# EAGLE board EbookReader Board (EAGLE 9.7.0)
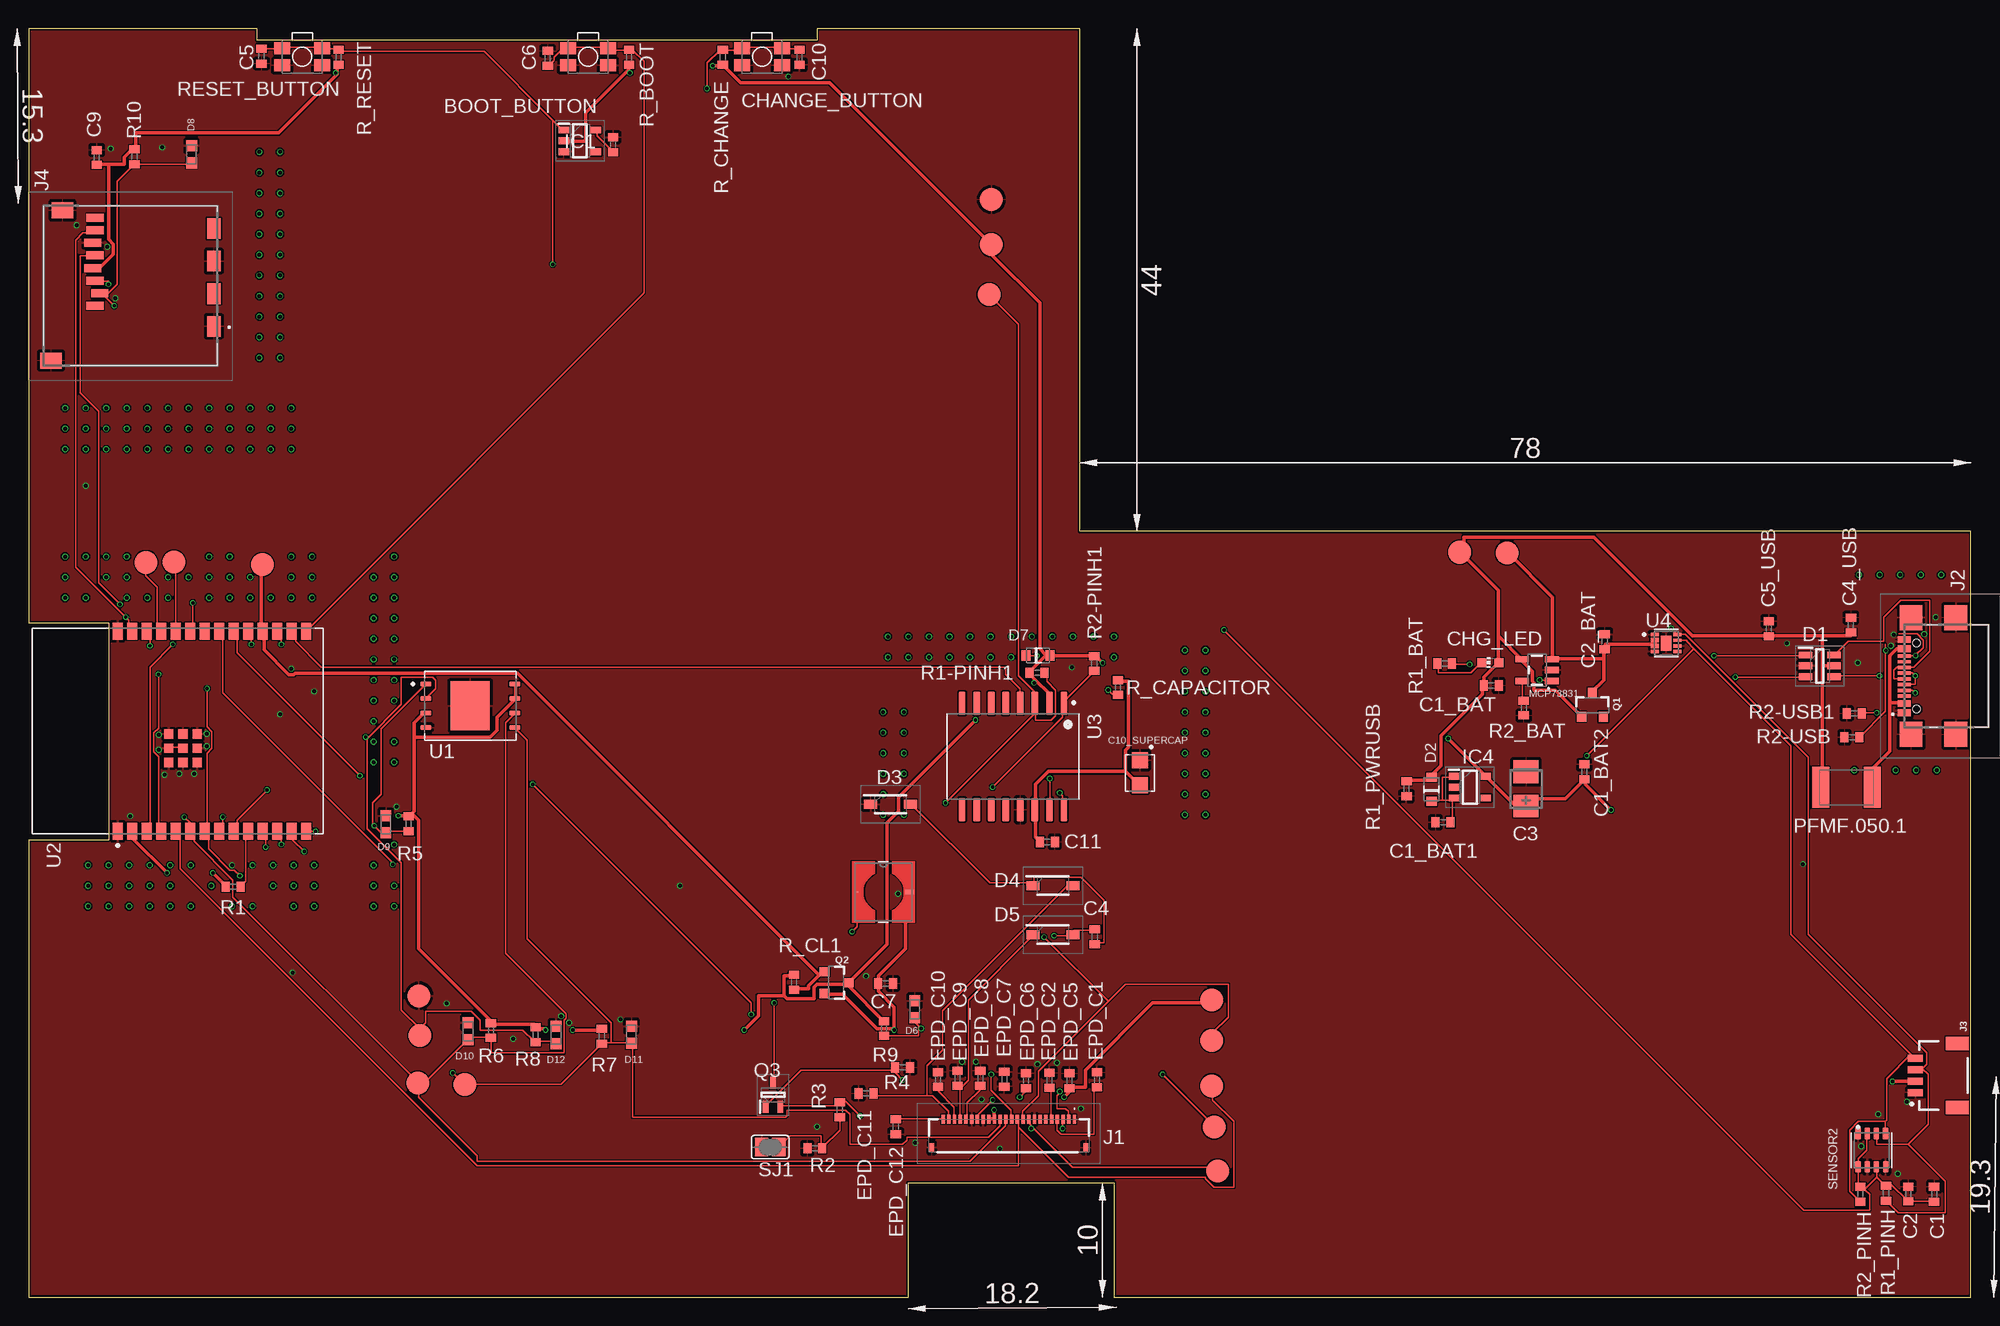
[diagram p0: board, top side]
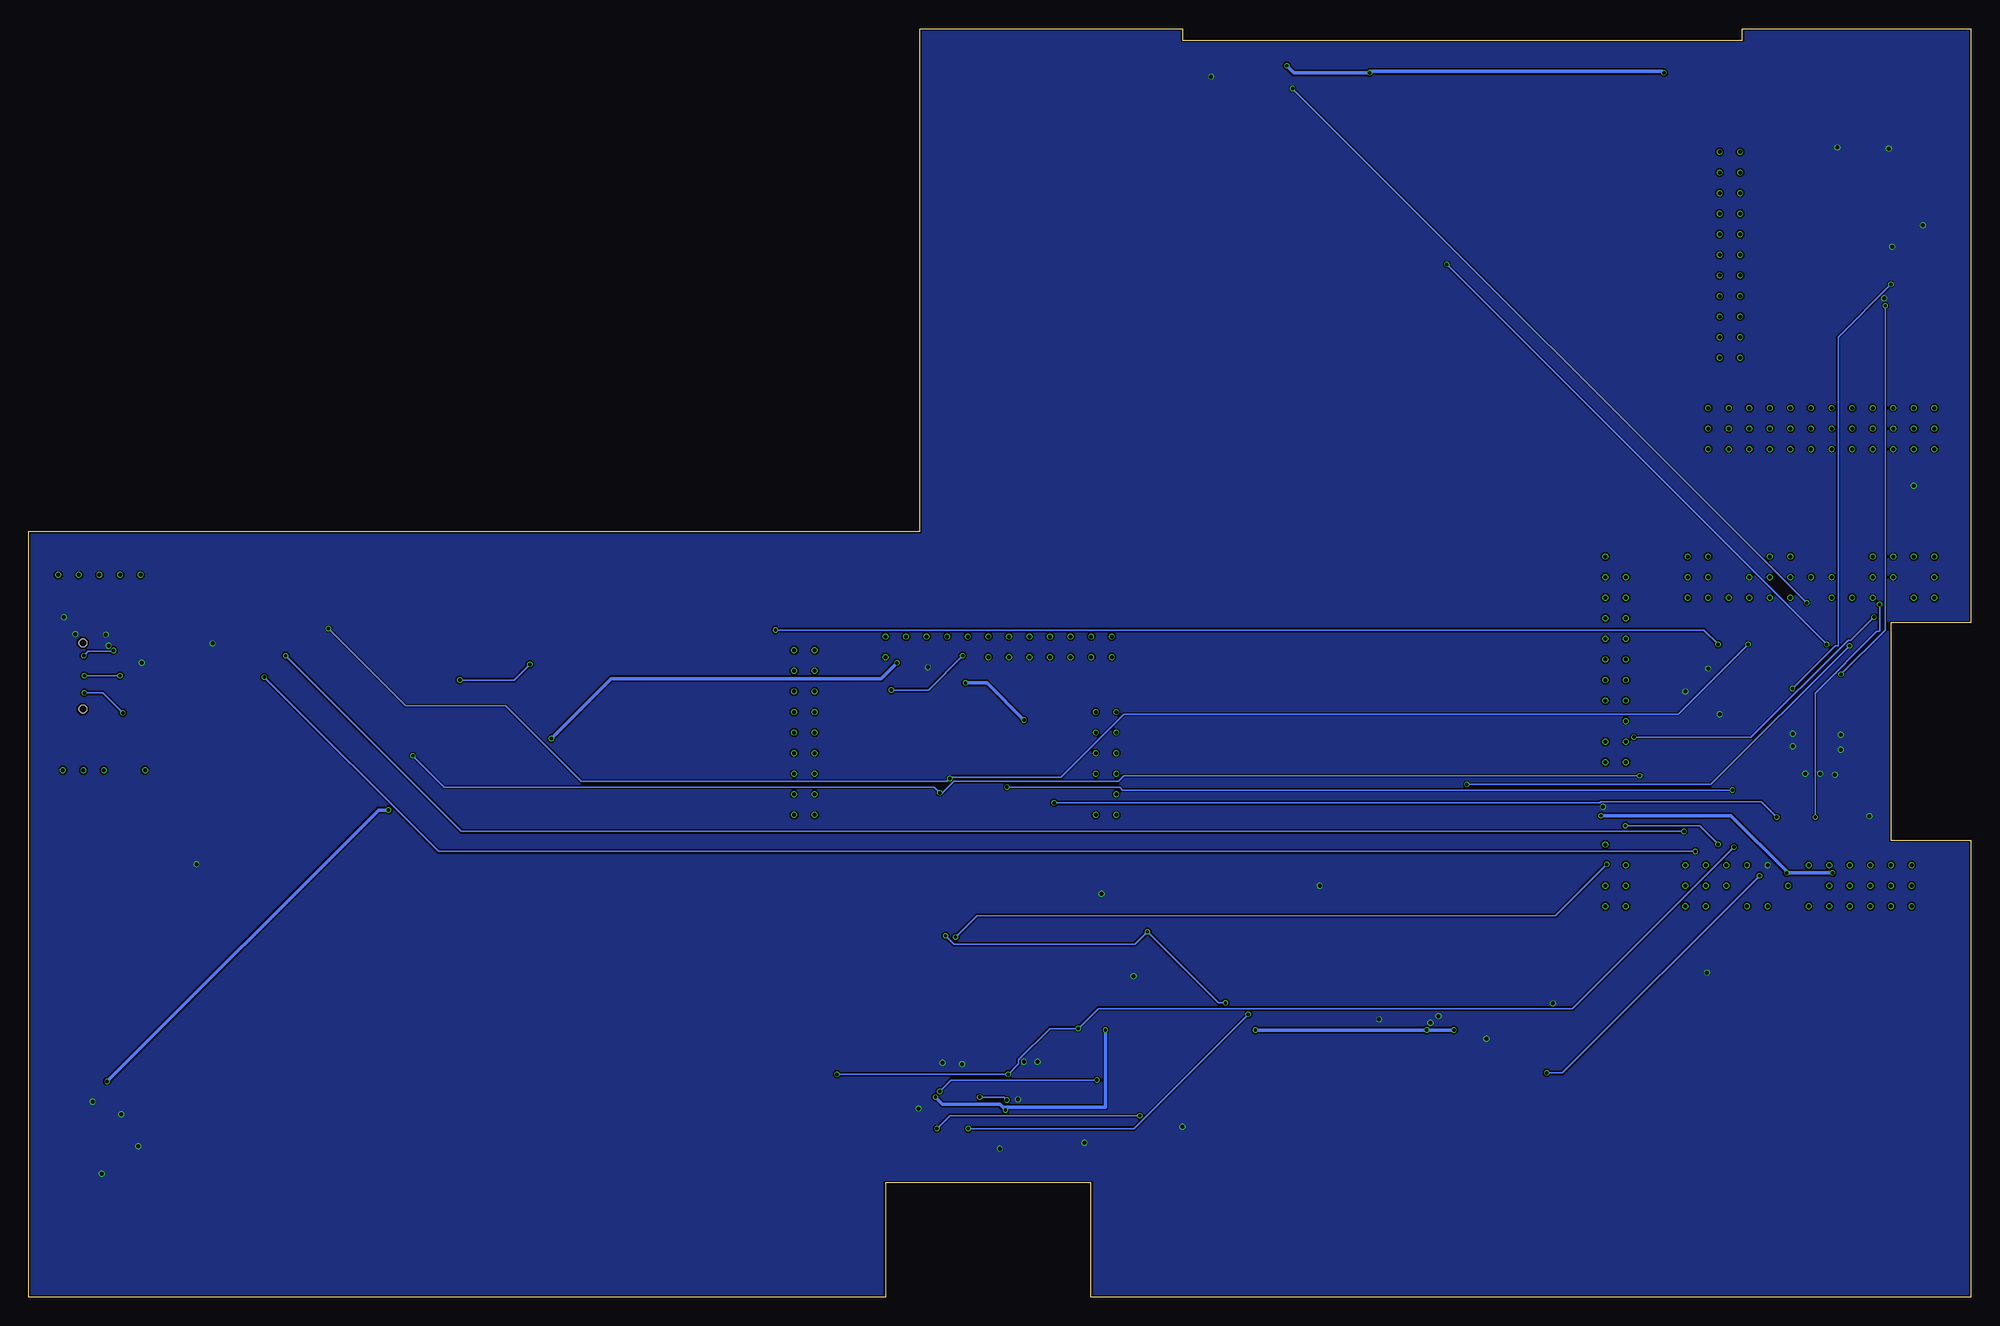
[diagram p1: board, bottom side, seen from below]

Size 170 x 111 mm. Coordinates in mm from the lower left corner, seen from the top.
Outline: 0,40 0,0 77,0 77,10 95,10 95,0 170,0 170,67 92,67 92,111 69,111 69,110 20,110 20,111 0,111 0,59 7,59 7,40 0,40
Copper layers (1*16): Top / Bottom
Stack-up Default Layer Stack: Top User Defined 0.035mm / Dielectric-1 User Defined 1mm / Bottom User Defined 0.035mm
Design rules: minimum copper width classes=1 0.3mm, minimum copper width 5mil, minimum drill size 0.3mm, copper clearance wire_polygon to wire_polygon 5mil, copper clearance wire_polygon to pad_smd 5mil, copper clearance wire_polygon to via 5mil, copper clearance pad_smd to pad_smd 5mil, copper clearance pad_smd to via 5mil, copper clearance via to via 5mil, copper clearance smd to pad (same net) 5mil, copper clearance smd to via (same net) 5mil, copper clearance smd to smd (same net) 5mil, dimension clearance 0.2mm, via restrict clearance 0mil, restrict clearance 0mil, drill distance 6mil, keepout clearance 0mil
Net classes: 1 Trasee de alimentare: width 0.3 mm

## Footprints (pad centres in the part's own frame; a part is rotated, then mirrored left to right if it is on the bottom)
TP20R = smd 2 x 2: TP 0,0
MYBUTTON = smd 1.4 x 1.05: 1 1.75,0.75; 2 -1.75,0.75; 3 -1.75,-0.75; 4 1.75,-0.75
ESP32_WROVER_EAGLE-LTSPICE_C0402 = smd 0.7 x 0.9: 1 -0.65,0; 2 0.65,0
RCL_CT3528 = smd 2 x 2.2: + -1.5,0; - 1.5,0
CAPCP3225X100N = smd 1.4 x 1.4: 1 -1.1,0; 2 1.1,0
ADAFRUIT_CHIP-LED0603 = smd 0.8 x 0.8: A 0,-0.75; C 0,0.75
SOT95P280X145-6N = smd 1.2 x 0.6: 1 -1.25,0.95; 2 -1.25,0; 3 -1.25,-0.95; 4 1.25,-0.95; 5 1.25,0; 6 1.25,0.95
ESP32_WROVER_AVX---SD0805S020S1R0_AVX_SD0805S020S1R0_0 = smd 0.8 x 0.9: 1 -1.05,0; 2 1.05,0
SOD3716X135N = smd 1.15 x 0.8: 1 -1.75,0; 2 1.75,0
DIOC1608X36N = smd 0.97 x 0.94: 1 -0.75,0; 2 0.75,0
SOT95P280X125-5N = smd 0.9 x 0.6: 1 -1.4,0.95; 2 -1.4,0; 3 -1.4,-0.95; 4 1.4,-0.95; 5 1.4,0.95
SOT95P280X120-5N = smd 0.9 x 0.6: 1 -1.4,0.95; 2 -1.4,0; 3 -1.4,-0.95; 4 1.4,-0.95; 5 1.4,0.95
FH34SRJ24S05SH99 = smd 0.3 x 0.8: 1 5.75,1.45; 2 5.25,1.45; 3 4.75,1.45; 4 4.25,1.45; 5 3.75,1.45; 6 3.25,1.45; 7 2.75,1.45; 8 2.25,1.45; 9 1.75,1.45; 10 1.25,1.45; 11 0.75,1.45; 12 0.25,1.45; 13 -0.25,1.45; 14 -0.75,1.45; 15 -1.25,1.45; 16 -1.75,1.45; 17 -2.25,1.45; 18 -2.75,1.45; 19 -3.25,1.45; 20 -3.75,1.45; 21 -4.25,1.45; 22 -4.75,1.45; 23 -5.25,1.45; 24 -5.75,1.45 | smd 0.4 x 0.8: MP1 6.75,-1.05; MP2 -6.75,-1.05
SAMACSYS_PARTS_USB4110GFA = smd 0.3 x 1.15: A1 -3.35,3.678; A4 -2.55,3.678; A5 -1.25,3.678; A6 -0.25,3.678; A7 0.25,3.678; A8 1.25,3.678; A9 2.55,3.678; A12 3.35,3.678; B1 3.05,3.678; B4 2.25,3.678; B5 1.75,3.678; B6 0.75,3.678; B7 -0.75,3.678; B8 -1.75,3.678; B9 -2.25,3.678; B12 -3.05,3.678 | smd 2.18 x 2: MP1 -5.11,-0.827; MP2 5.11,-0.827; MP3 -5.11,3.103; MP4 5.11,3.103 | hole 0.65: -2.89,2.603; 2.89,2.603
JST04_1MM_RA = smd 0.6 x 1.35: 1 -1.5,0; 2 -0.5,0; 3 0.5,0; 4 1.5,0 | smd 1.2 x 2: NC1 2.8,-3.675; NC2 -2.8,-3.675
112ATAARR03ATTEND = smd 1.8 x 1.2: G1 10.6,10.4; G2 4.9,10.4; S1 7.75,10.4; S2 2.05,10.4 | smd 1.4 x 1.9: G3 13.6,-3.85; G4 0.45,-2.85 | smd 0.7 x 1.5: P1 8.8,0; P2 7.7,0.4; P3 6.6,0; P4 5.5,-0.2; P5 4.4,0; P6 3.3,-0.2; P7 2.2,0; P8 1.1,0
IND_4828-WE-TPC_WRE = smd 0.127 x 0.127: 1 -2.286,0 | smd 0.813 x 0.406: 2 2.286,0
ESP32_WROVER_SPARKFUN-IC-POWER_SOT23-5 = smd 0.55 x 1.2: 1 -0.95,-1.3; 2 0,-1.3; 3 0.95,-1.3; 4 0.95,1.3; 5 -0.95,1.3
ESP32C6_VARISTOR_CT/CN1812 = smd 1.5 x 3.6: 1 -2.25,0; 2 2.25,0
ESP32_WROVER_SPARKFUN-DISCRETESEMI_SOT23-3 = smd 0.8 x 0.9: 1 -0.95,-1; 2 0.95,-1; 3 0,1.1
SOT65P210X110-3N = smd 1.05 x 0.5: 1 -1.05,0.65; 2 -1.05,-0.65; 3 1.05,0
ESP32_WROVER_EAGLE-LTSPICE_R0402 = smd 0.7 x 0.9: 1 -0.65,0; 2 0.65,0
ESP32_WROVER_BME680_PSON80P300X300X100-8N = smd 1.016 x 0.5: 1 1.458,1.2; 2 1.458,0.4; 3 1.458,-0.4; 4 1.458,-1.2; 5 -1.458,-1.22; 6 -1.458,-0.4; 7 -1.458,0.4; 8 -1.458,1.2
SJ = smd 1.168 x 1.6: 1 -0.762,0; 2 0.762,0
SON127P600X800X80-9N = smd 0.94 x 0.44: 1 -3.895,1.905; 2 -3.895,0.635; 3 -3.895,-0.635; 4 -3.895,-1.905; 5 3.895,-1.905; 6 3.895,-0.635; 7 3.895,0.635; 8 3.895,1.905 | smd 3.4 x 4.3: 9 0,0
XCVR_ESP32-C6-WROOM-1-N8 = smd 1.5 x 0.9: 1 -8.75,5.26; 2 -8.75,3.99; 3 -8.75,2.72; 4 -8.75,1.45; 5 -8.75,0.18; 6 -8.75,-1.09; 7 -8.75,-2.36; 8 -8.75,-3.63; 9 -8.75,-4.9; 10 -8.75,-6.17; 11 -8.75,-7.44; 12 -8.75,-8.71; 13 -8.75,-9.98; 14 -8.75,-11.25; 15 8.75,-11.25; 16 8.75,-9.98; 17 8.75,-8.71; 18 8.75,-7.44; 19 8.75,-6.17; 20 8.75,-4.9; 21 8.75,-3.63; 22 8.75,-2.36; 23 8.75,-1.09; 24 8.75,0.18; 25 8.75,1.45; 26 8.75,2.72; 27 8.75,3.99; 28 8.75,5.26 | smd 0.8 x 0.8: 29_1 -2.755,0.79; 29_2 -1.505,0.79; 29_3 -0.255,0.79; 29_4 -2.755,-0.46; 29_5 -1.505,-0.46; 29_6 -0.255,-0.46; 29_7 -2.755,-1.71; 29_8 -1.505,-1.71; 29_9 -0.255,-1.71
SOIC127P1032X265-16N = smd 2.05 x 0.59: 1 -4.655,4.445; 2 -4.655,3.175; 3 -4.655,1.905; 4 -4.655,0.635; 5 -4.655,-0.635; 6 -4.655,-1.905; 7 -4.655,-3.175; 8 -4.655,-4.445; 9 4.655,-4.445; 10 4.655,-3.175; 11 4.655,-1.905; 12 4.655,-0.635; 13 4.655,0.635; 14 4.655,1.905; 15 4.655,3.175; 16 4.655,4.445
SON50P200X200X80-9N = smd 0.76 x 0.27: 1 -0.985,0.75; 4 -0.985,-0.75; 5 0.985,-0.75; 6 0.985,-0.25; 7 0.985,0.25; 8 0.985,0.75 | smd 0.813 x 0.406: 2 -0.985,0.25; 3 -0.985,-0.25 | smd 0.9 x 1.3: 9 0,0

## Placement (x,y rotation side)
3V3  TPTP20R  [TP20R]  84.27,92.09 0 top
BOOT_BUTTON  BUTTON_CUSYOMV1  [MYBUTTON]  48.97,108.53 180 top
C1  100nF  [ESP32_WROVER_EAGLE-LTSPICE_C0402]  166.78,9.01 90 top
C1_BAT  4.7uF  [ESP32_WROVER_EAGLE-LTSPICE_C0402]  128.02,53.52 0 top
C1_BAT1  4.7uF  [ESP32_WROVER_EAGLE-LTSPICE_C0402]  123.79,41.55 180 top
C1_BAT2  4.7uF  [ESP32_WROVER_EAGLE-LTSPICE_C0402]  136.17,45.96 90 top
C2  100nF  [ESP32_WROVER_EAGLE-LTSPICE_C0402]  164.52,9.02 90 top
C2_BAT  4.7uF  [ESP32_WROVER_EAGLE-LTSPICE_C0402]  137.94,57.36 90 top
C3  100uF  [RCL_CT3528]  131.06,44.47 90 top
C4  4.7uF/25V  [ESP32_WROVER_EAGLE-LTSPICE_C0402]  93.31,31.53 90 top
C4_USB  [ESP32_WROVER_EAGLE-LTSPICE_C0402]  159.5,58.81 90 top
C5  10uF  [ESP32_WROVER_EAGLE-LTSPICE_C0402]  20.38,108.59 270 top
C5_USB  [ESP32_WROVER_EAGLE-LTSPICE_C0402]  152.3,58.5 90 top
C6  100nF  [ESP32_WROVER_EAGLE-LTSPICE_C0402]  45.44,108.39 90 top
C7  10uF  [ESP32_WROVER_EAGLE-LTSPICE_C0402]  75.01,27.44 0 top
C9  100nF  [ESP32_WROVER_EAGLE-LTSPICE_C0402]  5.96,99.72 90 top
C10  100nF  [ESP32_WROVER_EAGLE-LTSPICE_C0402]  67.48,108.49 270 top
C10_SUPERCAP  CPH3225A  [CAPCP3225X100N]  97.27,45.88 270 top
C11  100nF  [ESP32_WROVER_EAGLE-LTSPICE_C0402]  89.17,39.83 0 top
C_DELAY  100nF  [ESP32_WROVER_EAGLE-LTSPICE_C0402]  51.15,100.85 90 top
CHANGE_BUTTON  BUTTON_CUSYOMV1  [MYBUTTON]  64.19,108.53 180 top
CHG_LED  [ADAFRUIT_CHIP-LED0603]  127.94,55.52 90 top
D1  USBLC6-2SC6Y  [SOT95P280X145-6N]  156.78,55.24 0 top
D2  ESP32_WROVER_AVX---SD0805S020S1R0_AVX_SD0805S020S1R0_0_0AVX_SD0805S020S1R0_0_0  [ESP32_WROVER_AVX---SD0805S020S1R0_AVX_SD0805S020S1R0_0]  122.79,44.44 90 top
D3  MBR0530  [SOD3716X135N]  75.45,43.13 0 top
D4  MBR0530  [SOD3716X135N]  89.65,36.01 0 top
D5  MBR0530  [SOD3716X135N]  89.65,31.72 0 top
D6  PGB1010603MR  [DIOC1608X36N]  77.57,25.18 90 top
D7  ESP32_WROVER_AVX---SD0805S020S1R0_AVX_SD0805S020S1R0_0_0AVX_SD0805S020S1R0_0_0  [ESP32_WROVER_AVX---SD0805S020S1R0_AVX_SD0805S020S1R0_0]  88.35,56.15 0 top
D8  PGB1010603MR  [DIOC1608X36N]  14.27,99.99 90 top
D9  PGB1010603MR  [DIOC1608X36N]  31.27,41.37 90 top
D10  PGB1010603MR  [DIOC1608X36N]  38.47,23.26 90 top
D11  PGB1010603MR  [DIOC1608X36N]  52.77,22.95 90 top
D12  PGB1010603MR  [DIOC1608X36N]  46.17,22.94 90 top
EPD_3V3  TPTP20R  [TP20R]  103.57,26.01 0 top
EPD_3V3_C  TPTP20R  [TP20R]  20.47,64.11 0 top
EPD_BUSY  TPTP20R  [TP20R]  104.07,11.05 0 top
EPD_C1  1uF/50V  [ESP32_WROVER_EAGLE-LTSPICE_C0402]  93.5,19.01 270 top
EPD_C2  1uF/50V  [ESP32_WROVER_EAGLE-LTSPICE_C0402]  89.36,18.97 270 top
EPD_C5  0.1uF/50V  [ESP32_WROVER_EAGLE-LTSPICE_C0402]  91.1,18.93 270 top
EPD_C6  1uF/50V  [ESP32_WROVER_EAGLE-LTSPICE_C0402]  87.3,18.95 270 top
EPD_C7  1uF/50V  [ESP32_WROVER_EAGLE-LTSPICE_C0402]  85.4,19.07 90 top
EPD_C8  1uF/50V  [ESP32_WROVER_EAGLE-LTSPICE_C0402]  83.3,19.16 270 top
EPD_C9  1uF/50V  [ESP32_WROVER_EAGLE-LTSPICE_C0402]  81.3,19.15 270 top
EPD_C10  1uF/50V  [ESP32_WROVER_EAGLE-LTSPICE_C0402]  79.6,19.04 270 top
EPD_C11  1uF/50V  [ESP32_WROVER_EAGLE-LTSPICE_C0402]  73.3,17.83 0 top
EPD_C12  1uF/50V  [ESP32_WROVER_EAGLE-LTSPICE_C0402]  75.9,14.92 90 top
EPD_CS  TPTP20R  [TP20R]  103.77,14.89 0 top
EPD_DC  TPTP20R  [TP20R]  103.57,18.49 0 top
EPD_RST  TPTP20R  [TP20R]  103.57,22.47 0 top
GND  TPTP20R  [TP20R]  34.17,26.37 0 top
IC1  BD5229G-TR  [SOT95P280X125-5N]  48.26,101.17 0 top
IC4  XC6220A331MR-G  [SOT95P280X120-5N]  126.14,44.63 0 top
J1  FH34SRJ-24S-0.5SH_99_  [FH34SRJ24S05SH99]  85.79,14.13 0 top
J2  SAMACSYS_PARTS_USB4110-GF-A  [SAMACSYS_PARTS_USB4110GFA]  167.85,54.35 90 top
J3  QWIIC_RIGHT_ANGLE  [JST04_1MM_RA]  165.12,19.4 90 top
J4  112A-TAAR-R03_ATTEND  [112ATAARR03ATTEND]  5.82,95.55 270 top
L1  68uH  [IND_4828-WE-TPC_WRE]  74.82,35.45 0 top
MCP73831  ESP32_WROVER_SPARKFUN-IC-POWER_MCP73831  [ESP32_WROVER_SPARKFUN-IC-POWER_SOT23-5]  132.02,54.87 90 top
MISO  TPTP20R  [TP20R]  34.27,22.89 0 top
MOSI  TPTP20R  [TP20R]  38.17,18.6 0 top
PFMF.050.1  ESP32C6_VARISTORCN1812  [ESP32C6_VARISTOR_CT/CN1812]  159.1,44.61 180 top
Q1  20V/4.2A/52mΩ/1.4W  [ESP32_WROVER_SPARKFUN-DISCRETESEMI_SOT23-3]  136.87,51.79 0 top
Q2  20V/4.2A/52mΩ/1.4W  [ESP32_WROVER_SPARKFUN-DISCRETESEMI_SOT23-3]  70.67,27.52 270 top
Q3  SI1308EDL-T1-GE3  [SOT65P210X110-3N]  65.15,17.69 90 top
R1  10K  [ESP32_WROVER_EAGLE-LTSPICE_R0402]  17.91,35.91 180 top
R1-PINH1  10K  [ESP32_WROVER_EAGLE-LTSPICE_R0402]  88.27,54.64 180 top
R1_BAT  200  [ESP32_WROVER_EAGLE-LTSPICE_R0402]  123.94,55.44 0 top
R1_PINH  10K  [ESP32_WROVER_EAGLE-LTSPICE_R0402]  162.57,9.1 90 top
R1_PWRUSB  100K  [ESP32_WROVER_EAGLE-LTSPICE_R0402]  120.6,44.49 90 top
R2  2.2  [ESP32_WROVER_EAGLE-LTSPICE_R0402]  68.81,13.02 0 top
R2-PINH1  10K  [ESP32_WROVER_EAGLE-LTSPICE_R0402]  93.27,55.45 90 top
R2-USB  5k1  [ESP32_WROVER_EAGLE-LTSPICE_R0402]  159.58,49 180 top
R2-USB1  5k1  [ESP32_WROVER_EAGLE-LTSPICE_R0402]  159.78,51.08 0 top
R2_BAT  2K  [ESP32_WROVER_EAGLE-LTSPICE_R0402]  130.86,51.55 90 top
R2_PINH  10K  [ESP32_WROVER_EAGLE-LTSPICE_R0402]  160.32,9.01 90 top
R3  0.47  [ESP32_WROVER_EAGLE-LTSPICE_R0402]  71,16.41 90 top
R4  10K  [ESP32_WROVER_EAGLE-LTSPICE_R0402]  76.5,20.1 180 top
R5  10K  [ESP32_WROVER_EAGLE-LTSPICE_R0402]  33.27,41.42 90 top
R6  10K  [ESP32_WROVER_EAGLE-LTSPICE_R0402]  40.47,23.33 90 top
R7  10K  [ESP32_WROVER_EAGLE-LTSPICE_R0402]  50.17,22.84 90 top
R8  10K  [ESP32_WROVER_EAGLE-LTSPICE_R0402]  44.37,22.95 90 top
R9  10K  [ESP32_WROVER_EAGLE-LTSPICE_R0402]  74.87,23.51 90 top
R10  10K  [ESP32_WROVER_EAGLE-LTSPICE_R0402]  9.27,99.8 90 top
R_BOOT  10K  [ESP32_WROVER_EAGLE-LTSPICE_R0402]  52.57,108.49 90 top
R_CAPACITOR  15  [ESP32_WROVER_EAGLE-LTSPICE_R0402]  95.35,53.34 90 top
R_CHANGE  10K  [ESP32_WROVER_EAGLE-LTSPICE_R0402]  60.76,108.5 90 top
R_CL1  10K  [ESP32_WROVER_EAGLE-LTSPICE_R0402]  67,27.54 270 top
R_RESET  10K  [ESP32_WROVER_EAGLE-LTSPICE_R0402]  27.14,108.49 90 top
RESET_BUTTON  BUTTON_CUSYOMV1  [MYBUTTON]  23.96,108.53 180 top
RX  TPTP20R  [TP20R]  12.72,64.31 0 top
SCK  TPTP20R  [TP20R]  34.07,18.73 0 top
SENSOR2  ESP32_WROVER_BME680_BME680  [ESP32_WROVER_BME680_PSON80P300X300X100-8N]  161.32,12.86 90 top
SJ1  [SJ]  64.91,13.13 0 top
TP3  TPTP20R  [TP20R]  129.4,65.13 0 top
TP4  TPTP20R  [TP20R]  84.27,96.05 0 top
TP14  TPTP20R  [TP20R]  125.27,65.18 0 top
TP15  TPTP20R  [TP20R]  84.07,87.73 0 top
TX  TPTP20R  [TP20R]  10.27,64.29 0 top
U1  W25Q512JVEIQ  [SON127P600X800X80-9N]  38.65,51.75 0 top
U2  ESP32-C6-WROOM-1-N8  [XCVR_ESP32-C6-WROOM-1-N8]  13.06,49.53 90 top
U3  DS3231SN#  [SOIC127P1032X265-16N]  86.16,47.31 270 top
U4  MAX17048G+T10  [SON50P200X200X80-9N]  143.32,57.23 0 top

## Library data of the parts
3V3 BOOT_BUTTON CHANGE_BUTTON CHG_LED EPD_3V3 EPD_3V3_C EPD_BUSY EPD_CS EPD_DC EPD_RST GND MISO MOSI PFMF.050.1 RESET_BUTTON RX SCK SJ1 TP3 TP4 TP14 TP15 TX = DeskAssistant v19 v1
C1 C1_BAT C1_BAT1 C1_BAT2 C2 C2_BAT C4 C4_USB C5 C5_USB C6 C7 C9-C11 C_DELAY EPD_C1 EPD_C2 EPD_C5-EPD_C12 = DeskAssistant v19 v1; SPICEMODEL: NONE; SPICEPREFIX: C
C3 = DeskAssistant v19 v1; SPICEPREFIX: C
C10_SUPERCAP = DeskAssistant v19 v1; AVAILABILITY: Not in stock; CHECK_PRICES: https://www.snapeda.com/parts/CPH3225A/Seiko+Instruments/view-part/?ref=eda; DESCRIPTION: 11 mF (EDLC) Supercapacitor 3.3 V 1210 (3225 Metric) - -; MF: Seiko Instruments; MP: CPH3225A; PACKAGE: 1210 Seiko; PRICE: None; PURCHASE-URL: https://www.snapeda.com/api/url_track_click_mouser/?unipart_id=562593&manufacturer=Seiko Instruments&part_name=CPH3225A&search_term=None; SNAPEDA_LINK: https://www.snapeda.com/parts/CPH3225A/Seiko+Instruments/view-part/?ref=snap
D1 = DeskAssistant v19 v1; AVAILABILITY: In Stock; CHECK_PRICES: https://www.snapeda.com/parts/USBLC6-2SC6Y/STMicroelectronics/view-part/?ref=eda; DESCRIPTION: 17V Clamp 5A (8/20µs) Ipp Tvs Diode Surface Mount SOT-23-6; MF: STMicroelectronics; MP: USBLC6-2SC6Y; PACKAGE: SOT-23-6 STMicroelectronics; PRICE: None; SNAPEDA_LINK: https://www.snapeda.com/parts/USBLC6-2SC6Y/STMicroelectronics/view-part/?ref=snap
D2 D7 = DeskAssistant v19 v1; CENTROID_NOT_SPECIFIED: No; DATASHEET: http://datasheets.avx.com/schottky.pdf; DIGIKEY_DESCRIPTION: DIODE SCHOTTKY 20V 1A 0805; DIGIKEY_PART_NUMBER: 478-7800-1-ND; LEAD_FREE: yes; MF: AVX; MOUSER_PART_NUMBER: 581-SD0805S020S1R0; PACKAGE: 0805 (2012 metric); PREFIX: D; ROHS: yes; TEMPERATURE_RANGE_HIGH: +125°C; TEMPERATURE_RANGE_LOW: -55°C
D3-D5 = DeskAssistant v19 v1; AVAILABILITY: In Stock; CHECK_PRICES: https://www.snapeda.com/parts/MBR0530/Onsemi/view-part/?ref=eda; DESCRIPTION: Diode Schottky 30 V 500mA Surface Mount SOD-123; MF: ON Semiconductor; MP: MBR0530; PACKAGE: SOD-123-2 ON Semiconductor; PRICE: None; PURCHASE-URL: https://www.snapeda.com/api/url_track_click_mouser/?unipart_id=179458&manufacturer=ON Semiconductor&part_name=MBR0530&search_term=None; SNAPEDA_LINK: https://www.snapeda.com/parts/MBR0530/Onsemi/view-part/?ref=snap
D6 D8-D12 = DeskAssistant v19 v1; AVAILABILITY: In Stock; CHECK_PRICES: https://www.snapeda.com/parts/PGB1010603MR/Littelfuse/view-part/?ref=eda; DESCRIPTION: 150V (Typ) Clamp - Ipp Tvs Diode Surface Mount 0603 (1608 Metric); MF: Littelfuse Inc.; MP: PGB1010603MR; PACKAGE: 0603 Littelfuse Inc.; PRICE: None; PURCHASE-URL: https://www.snapeda.com/api/url_track_click_mouser/?unipart_id=5659453&manufacturer=Littelfuse Inc.&part_name=PGB1010603MR&search_term=None; SNAPEDA_LINK: https://www.snapeda.com/parts/PGB1010603MR/Littelfuse/view-part/?ref=snap
IC1 = DeskAssistant v19 v1; DESCRIPTION: Voltage Detector with Adjustable Delay Time: CMOS processes are utilized to develop high precision, low current consumption CMOS reset ICs that allow arbitrary setting of the delay time. The extensive lineup includes both Nch Open Drain and CMOS output types in a wide range of detection voltages (from 2.3V to 6.0V, in 0.1V steps), enabling selection of the ideal solution based on customer requirements. In addition, the entire series is of course both lead-free and RoHS-compliant.; HEIGHT: 1.25mm; MANUFACTURER_NAME: ROHM Semiconductor; MANUFACTURER_PART_NUMBER: BD5229G-TR; MOUSER_PART_NUMBER: 755-BD5229G-TR; MOUSER_PRICE-STOCK: https://www.mouser.co.uk/ProductDetail/ROHM-Semiconductor/BD5229G-TR?qs=4kLU8WoGk0vvnhrrYwdszw%3D%3D
IC4 = DeskAssistant v19 v1; DESCRIPTION: LDO Voltage Regulators; HEIGHT: 1.2mm; MANUFACTURER_NAME: Torex; MANUFACTURER_PART_NUMBER: XC6220A331MR-G; MOUSER_PART_NUMBER: 865-XC6220A331MR-G; MOUSER_PRICE-STOCK: https://www.mouser.co.uk/ProductDetail/Torex-Semiconductor/XC6220A331MR-G?qs=AsjdqWjXhJ8ZSWznL1J0gg%3D%3D
J1 = DeskAssistant v19 v1; DESCRIPTION: 24 Position FFC, FPC Connector Contacts, Top and Bottom 0.020" (0.50mm) Surface Mount, Right Angle; HEIGHT: 1.1mm; MANUFACTURER_NAME: Hirose; MANUFACTURER_PART_NUMBER: FH34SRJ-24S-0.5SH(99); MOUSER_PART_NUMBER: 798-FH34SRJ24S05SH99; MOUSER_PRICE-STOCK: https://www.mouser.co.uk/ProductDetail/Hirose-Connector/FH34SRJ-24S-0.5SH99?qs=vcbW%252B4%252BSTIpKBl5ap9J8Fw%3D%3D
J2 = DeskAssistant v19 v1; DESCRIPTION: CONN USB 2.0 TYPE-C R/A SMT; HEIGHT: 3.26mm; MANUFACTURER_NAME: GCT (GLOBAL CONNECTOR TECHNOLOGY); MANUFACTURER_PART_NUMBER: USB4110-GF-A; MOUSER_PART_NUMBER: 640-USB4110-GF-A; MOUSER_PRICE-STOCK: https://www.mouser.co.uk/ProductDetail/GCT/USB4110-GF-A?qs=KUoIvG%2F9IlYiZvIXQjyJeA%3D%3D
J3 = DeskAssistant v19 v1; PROD_ID: CONN-13694
J4 = DeskAssistant v19 v1; DESCRIPTION: Micro SD Card Socket, Push-Push Type, Top Mount, SMT, H=1.83mm, 10u; HEIGHT: 1.9mm; MANUFACTURER_NAME: ATTEND; MANUFACTURER_PART_NUMBER: 112A-TAAR-R03 ATTEND
L1 = DeskAssistant v19 v1; COPYRIGHT: Copyright (C) 2024 Ultra Librarian. All rights reserved.; MANUFACTURER_PART_NUMBER: 744043680; MFR_NAME: Wurth Electronics
MCP73831 = DeskAssistant v19 v1; PROD_ID: IC-09995
Q1 Q2 = DeskAssistant v19 v1; PROD_ID: TRAN-14388
Q3 = DeskAssistant v19 v1; AVAILABILITY: In Stock; CHECK_PRICES: https://www.snapeda.com/parts/SI1308EDL-T1-GE3/Vishay+Siliconix/view-part/?ref=eda; DESCRIPTION: Si1308EDL-T1-GE3 N-channel MOSFET Transistor, 1.5 A, 30 V, 3-Pin SC-70 | Siliconix / Vishay SI1308EDL-T1-GE3; MF: Vishay Siliconix; MP: SI1308EDL-T1-GE3; PACKAGE: SOT-323 Vishay Semiconductor; PRICE: None; PURCHASE-URL: https://www.snapeda.com/api/url_track_click_mouser/?unipart_id=274603&manufacturer=Vishay Siliconix&part_name=SI1308EDL-T1-GE3&search_term=None; SNAPEDA_LINK: https://www.snapeda.com/parts/SI1308EDL-T1-GE3/Vishay+Siliconix/view-part/?ref=snap
R1 R1-PINH1 R1_BAT R1_PINH R1_PWRUSB R2 R2-PINH1 R2-USB R2-USB1 R2_BAT R2_PINH R3-R10 R_BOOT R_CAPACITOR R_CHANGE R_CL1 R_RESET = DeskAssistant v19 v1; SPICEMODEL: NONE; SPICEPREFIX: R
SENSOR2 = DeskAssistant v19 v1; AVAILABILITY: Unavailable; DESCRIPTION: Integrated Environmental Unit; MF: Bosch Sensortec; MP: BME680; PACKAGE: LGA-8 Bosch Tools; PRICE: None
U1 = DeskAssistant v19 v1; AVAILABILITY: In Stock; CHECK_PRICES: https://www.snapeda.com/parts/W25Q512JVEIQ/Winbond+Electronics/view-part/?ref=eda; DESCRIPTION: FLASH - NOR Memory IC 512Mb (64M x 8) SPI - Quad I/O 133 MHz 8-WSON (8x6); MF: Winbond Electronics; MP: W25Q512JVEIQ; PACKAGE: Package; PRICE: None; SNAPEDA_LINK: https://www.snapeda.com/parts/W25Q512JVEIQ/Winbond+Electronics/view-part/?ref=snap
U2 = DeskAssistant v19 v1; AVAILABILITY: In Stock; CHECK_PRICES: https://www.snapeda.com/parts/ESP32-C6-WROOM-1-N8/Espressif+Systems/view-part/?ref=eda; DESCRIPTION: Multiprotocol Modules ESP32-C6 module, Wi-Fi 6 in 2.4 GHz band, Bluetooth 5, Zigbee 3.0 and Thread. ESP34-WROOM Compatible - ENGINEERING SAMPLE; MF: Espressif Systems; MP: ESP32-C6-WROOM-1-N8; PACKAGE: None; PRICE: None; SNAPEDA_LINK: https://www.snapeda.com/parts/ESP32-C6-WROOM-1-N8/Espressif+Systems/view-part/?ref=snap
U3 = DeskAssistant v19 v1; AVAILABILITY: In Stock; CHECK_PRICES: https://www.snapeda.com/parts/DS3231SN%23/Analog+Devices/view-part/?ref=eda; DESCRIPTION: Extremely Accurate I²C-Integrated RTC/TCXO/Crystal; MF: Analog Devices; MP: DS3231SN#; PACKAGE: SOIC-16 Maxim; PRICE: None; PURCHASE-URL: https://www.snapeda.com/api/url_track_click_mouser/?unipart_id=99048&manufacturer=Analog Devices&part_name=DS3231SN#&search_term=None; SNAPEDA_LINK: https://www.snapeda.com/parts/DS3231SN%23/Analog+Devices/view-part/?ref=snap
U4 = DeskAssistant v19 v1; AVAILABILITY: In Stock; CHECK_PRICES: https://www.snapeda.com/parts/MAX17048G+T10/Analog+Devices/view-part/?ref=eda; DESCRIPTION: 3µA 1-Cell/2-Cell Fuel Gauge with ModelGauge; MF: Analog Devices; MP: MAX17048G+T10; PACKAGE: TDFN-8 Maxim; PRICE: None; PURCHASE-URL: https://www.snapeda.com/api/url_track_click_mouser/?unipart_id=329239&manufacturer=Analog Devices&part_name=MAX17048G+T10&search_term=None; SNAPEDA_LINK: https://www.snapeda.com/parts/MAX17048G+T10/Analog+Devices/view-part/?ref=snap

## Nets
3V3 [Trasee de alimentare]: 3V3.TP C1_BAT2.1 C3.+ C9.1 D7.2 IC1.2 IC4.5 J3.2 J4.P4 Q2.3 R1-PINH1.2 R1.2 R2-PINH1.2 R5.2 R6.2 R7.2 R8.2 R9.2 R10.2 R_BOOT.1 R_CHANGE.1 R_CL1.1 R_RESET.1 U1.3 U1.7 U1.8 U2.2 U3.2
32KHZ: R2-PINH1.1 U2.9 U3.1
DN: D1.4 J2.A7 J2.B7
DP: D1.6 J2.A6 J2.B6
EPD_3V3 [Trasee de alimentare]: C7.1 EPD_3V3.TP EPD_C5.2 J1.15 J1.16 L1.2 Q2.2
EPD_3V3_C [Trasee de alimentare]: EPD_3V3_C.TP Q2.1 R_CL1.2 U2.18
EPD_BUSY: EPD_BUSY.TP J1.9 U2.26
EPD_CS: D6.1 EPD_CS.TP J1.12 R9.1 U2.11
EPD_DC: EPD_DC.TP J1.11 U2.5
EPD_RST: EPD_RST.TP J1.10 U2.21
FLASH_CS: D9.1 R5.1 U1.1 U2.12
GDR: J1.2 Q3.1 R4.2
GND: BOOT_BUTTON.1 BOOT_BUTTON.2 C1.2 C1_BAT1.2 C1_BAT2.2 C1_BAT.2 C2.2 C2_BAT.2 C3.- C4_USB.2 C5.2 C5_USB.2 C6.2 C7.2 C9.2 C10.2 C10_SUPERCAP.1 C11.2 C_DELAY.2 CHANGE_BUTTON.1 CHANGE_BUTTON.2 D1.2 D3.1 D6.2 D8.2 D9.2 D10.2 D11.2 D12.2 EPD_C1.1 EPD_C2.1 EPD_C5.1 EPD_C6.1 EPD_C7.1 EPD_C7.2 EPD_C8.1 EPD_C9.1 EPD_C10.1 EPD_C11.1 EPD_C12.1 GND.TP IC1.3 IC4.2 J1.8 J1.17 J1.19 J1.MP1 J1.MP2 J2.A1 J2.A12 J2.B1 J2.B12 J2.MP1 J2.MP2 J2.MP3 J2.MP4 J3.1 J4.G1 J4.G2 J4.G3 J4.G4 J4.P6 MCP73831.2 R1_PWRUSB.1 R2-USB1.1 R2-USB.2 R2.1 R2_BAT.1 R4.1 RESET_BUTTON.1 RESET_BUTTON.2 SENSOR2.1 SENSOR2.5 SENSOR2.7 SJ1.1 TP4.TP U1.4 U1.9 U2.1 U2.28 U2.29_1 U2.29_2 U2.29_3 U2.29_4 U2.29_5 U2.29_6 U2.29_7 U2.29_8 U2.29_9 U3.13 U4.1 U4.4 U4.6 U4.9
GPIO8: R1.1 U2.10
I2C_PW: C1.1 C2.1 R1_PINH.2 R2_PINH.2 SENSOR2.2 SENSOR2.6 SENSOR2.8 U2.17
INT_RTC: R1-PINH1.1 TP15.TP U2.8 U3.3
IO/BOOT: BOOT_BUTTON.3 BOOT_BUTTON.4 C6.1 R_BOOT.2 U2.15
IO/CHANGE: C10.1 CHANGE_BUTTON.3 CHANGE_BUTTON.4 R_CHANGE.2 U2.23
MISO: D12.1 J4.P7 MISO.TP R8.1 U1.2 U2.27
MOSI: D11.1 J1.14 J4.P3 MOSI.TP R7.1 U1.5 U2.7
N$3: C1_BAT1.1 D2.1 IC4.1 IC4.3
N$4: C4.1 D3.2 D4.1
N$5: J2.A5 R2-USB1.2
N$6: EPD_C6.2 J1.18
N$7: CHG_LED.C R1_BAT.1
N$8: J2.B5 R2-USB.1
N$9: MCP73831.1 R1_BAT.2
N$10: MCP73831.5 R2_BAT.2
N$11: EPD_C8.2 J1.20
N$12: EPD_C2.2 J1.5
N$13: EPD_C1.2 J1.4
N$14: C_DELAY.1 IC1.5
N$15: EPD_C10.2 J1.22
N$16: D7.1 R_CAPACITOR.1
N$17: EPD_C12.2 J1.24
PREVGH: D5.1 EPD_C9.2 J1.21
PREVGL: D4.2 EPD_C11.2 J1.23
RESE: J1.3 Q3.2 R3.2
RESE': R2.2 R3.1 SJ1.2
RESET: C5.1 IC1.1 R_RESET.2 RESET_BUTTON.3 RESET_BUTTON.4 U2.3
RTC_RST: U2.16 U3.4
RX: RX.TP U2.24
SCK: D10.1 J1.13 J4.P5 R6.1 SCK.TP U1.6 U2.6
SCL: J3.4 R2_PINH.1 SENSOR2.4 U2.20 U3.16 U4.7
SDA: J3.3 R1_PINH.1 SENSOR2.3 U2.19 U3.15 U4.8
SRC: C4.2 D5.2 L1.1 Q3.3
SS_SD: D8.1 J4.P2 R10.1 U2.4
TX: TX.TP U2.25
USB_D+: D1.1 U2.14
USB_D-: D1.3 U2.13
VBAT [Trasee de alimentare]: C2_BAT.1 MCP73831.3 Q1.3 TP3.TP U4.2 U4.3
VBUS [Trasee de alimentare]: C1_BAT.1 C4_USB.1 C5_USB.1 CHG_LED.A D1.5 D2.2 MCP73831.4 PFMF.050.1.2 Q1.1 R1_PWRUSB.2 TP14.TP
VRTC [Trasee de alimentare]: C10_SUPERCAP.2 C11.1 R_CAPACITOR.2 U3.14
VUSB [Trasee de alimentare]: J2.A4 J2.A9 J2.B4 J2.B9 PFMF.050.1.1

## Tracks (layer width: path | path; a pad name or v marks a point on that pad's centre or on a via)
3V3  (via drill 0.3)
  Top 0.3: v16.12,37.12 17.25,36 R1.2 | v12.12,37.12 9.12,40.12 9.12,40.75 U2.2 | R9.2 74.75,24.25 71.88,27.12 71.88,27.5 Q2.3 | 66.12,26.38 66.12,28.12 67,28.12 R_CL1.1 | 66.12,26.38 66.38,26.12 68.75,26.12 68.75,27.12 69,27.38 71.62,27.38 71.62,27.5 Q2.3 | v47.62,23.38 50.12,23.38 R7.2 | v45.25,23.38 45.12,23.5 44.38,23.5 R8.2 44.25,23.62 44.25,23.88 40.5,23.88 R6.2 40.5,24.12 34.12,30.5 34.12,41.75 33.62,42.25 R5.2 | U1.8 42.62,53.62 42.62,52.5 U1.7 42.5,52.25 41,50.75 41,49.62 40.38,49 33.75,49 | 33.75,49 33.75,50.25 34.62,51.12 U1.3 | 33.75,49 33.75,42.5 33.38,42.12 R5.2 | 66.12,26.38 63.88,26.38 63.88,24.62 v62.62,23.38 | v32.38,42.12 33.25,42.12 R5.2 | v163.12,18.88 165.12,18.88 J3.2 | v138.5,42.62 136.25,44.88 136.25,45.25 C1_BAT2.1 136.12,45.25 134.5,43.62 131,43.62 131,43.12 C3.+ 131,43 130.12,43 127.62,45.5 IC4.5 127.5,45.62 v124.25,48.88 | 7,99.12 8.38,99.12 8.38,99.75 9,100.38 9.25,100.38 R10.2 9.38,100.5 9.38,101.88 21.88,101.88 27,107 27,107.12 | 7,99.12 6,99.12 C9.1 | 27,107.12 27,107.62 27.12,107.75 R_RESET.1 | J4.P4 5.62,90.12 6.28,90.12 7.43,91.27 7.43,92.12 7,92.55 7,99.12 | 89.06,56.19 89.12,56.25 89.38,56.25 D7.2 89.5,56.12 93.25,56.12 R2-PINH1.2 93.38,56.12 v94,55.5 | 89.06,56.19 87.62,54.75 R1-PINH1.2 87.62,54.5 88.19,53.94 | 88.19,53.94 89.25,52.88 89.25,52 U3.2 | 52.44,107.31 52.5,107.38 52.5,107.75 R_BOOT.1 | 52.44,107.31 48.75,103.62 48.75,101.12 46.88,101.12 IC1.2 | v59.88,107.75 60.75,107.75 R_CHANGE.1 60.88,107.75 60.88,107.72 62.32,106.27 70.1,106.27 84.25,92.12 3V3.TP 84.38,92 84.38,91.12 88.5,87 88.5,56.75 89.06,56.19 | 52.44,107.31 v52.62,107.12
  Top 0.3: v26.88,107.12 27,107.12 | v82.88,50.5 76.12,43.75 76.12,42.5 75.12,41.5 75.12,30.88 71.88,27.62 Q2.3 | 88.19,53.94 v88,53.75
  Bottom 0.3: v12.12,37.12 v16.12,37.12 16.12,37.25 21,42.12 v32.38,42.12 | v45.25,23.38 v47.62,23.38 v62.62,23.38 | v163.12,18.88 139.38,42.62 v138.5,42.62 | v59.88,107.75 59.25,107.12 v52.62,107.12 52.62,107.25 27,107.25 v26.88,107.12 | v124.25,48.88 119,54.12 95.38,54.12 v94,55.5 | v82.88,50.5 86.12,53.75 v88,53.75
32KHZ  (via drill 0.3)
  Top 0.127: R2-PINH1.1 93.25,54.75 90.62,52.12 90.62,52 U3.1 90.5,51.88 90.5,50.75 v84.38,44.62 | v20.88,44.38 18.25,41.75 18.25,41.12 18,40.88 U2.9
  Bottom 0.127: v20.88,44.38 74.25,44.38 74.5,44.62 v84.38,44.62
DN  (via drill 0.3)
  Top 0.127: J2.B7 164.25,53.62 165.12,53.62 v165.12,54.38 164.88,54.62 164.25,54.62 J2.A7 | v162,54.38 158.12,54.38 D1.4
  Bottom 0.127: v165.12,54.38 v162,54.38
DP
  Top 0.127: J2.A6 164.12,54.12 163.25,54.12 163.25,54.88 163.5,55.12 164.12,55.12 J2.B6 164.25,55.12 165,55.12 166.38,56.5 166.38,61 163.88,61 162.38,59.5 162.38,57.38 159.25,57.38 158.12,56.25 D1.6
EPD_3V3  (via drill 0.3)
  Top 0.3: 75.75,23.5 74.25,23.5 71.38,26.38 71.38,26.5 69.75,26.5 Q2.2 | 75.75,23.5 75.75,25.38 74.38,26.75 74.38,27.38 C7.1 74.38,27.5 74.38,28.12 76.75,30.5 76.75,35.12 77,35.38 L1.2 | J1.16 84.12,15.62 84.5,15.62 J1.15 84.5,15.75 v84.5,16.38 | EPD_3V3.TP 103.5,26 103.5,25.75 98.38,25.75 92.5,19.88 92.5,18.38 91.12,18.38 EPD_C5.2 91,18.25 91,17.88 v90.62,17.5 | v75.75,23.38 75.75,23.5
  Bottom 0.3: 84.69,16.56 85,16.88 90,16.88 v90.62,17.5 | 84.69,16.56 v84.5,16.38 | v75.75,23.38 75.75,16.62 84.62,16.62 84.69,16.56
EPD_3V3_C
  Top 0.3: 69.19,28.19 69.38,28.38 69.62,28.38 Q2.1 | 69.19,28.19 68.25,27.25 68.25,27 67,27 R_CL1.2 | EPD_3V3_C.TP 20.38,64 20.38,58.38 U2.18 20.62,58.25 20.62,56.63 22.78,54.47 23.22,54.47 23.34,54.59 42.78,54.59 69.19,28.19
EPD_BUSY  (via drill 0.3)
  Top 0.127: 87.88,14.88 91.38,11.38 104,11.38 104,11.12 EPD_BUSY.TP | 87.88,14.88 87.62,15.12 87.62,15.5 J1.9 | v10.62,57 10.62,58 10.38,58.25 U2.26 | v44.12,44.88 63.25,25.75 v63.25,24.75 | 87.88,14.88 v87.75,14.75
  Bottom 0.127: v10.62,57 22.75,44.88 v44.12,44.88 | v63.25,24.75 73.25,14.75 v87.75,14.75
EPD_CS  (via drill 0.3)
  Top 0.127: v84.25,19.5 84.25,18.12 86,16.38 86,15.62 J1.12 | 77.88,23.75 77.62,24 77.62,24.38 D6.1 | 77.88,23.75 v78.12,23.5 | 77.88,23.75 77.88,22.88 74.88,22.88 R9.1 | v20.75,39.38 20.75,40.5 20.5,40.75 U2.11 | v99.25,19.5 103.75,15 EPD_CS.TP
  Bottom 0.127: v20.75,39.38 34.88,25.25 76.38,25.25 v78.12,23.5 80.62,23.5 83.34,20.78 83.34,20.41 v84.25,19.5 v99.25,19.5
EPD_DC
  Top 0.127: 86.62,14.88 86.62,15.5 J1.11 | 86.62,14.88 91,10.5 103,10.5 103,10.38 103.75,9.62 105.5,9.62 105.5,15.38 103.62,17.25 103.62,18.38 EPD_DC.TP | 86.62,14.88 86.62,11.5 39.25,11.5 13.25,37.5 13.25,40.5 13,40.75 U2.5
EPD_RST  (via drill 0.3)
  Top 0.127: 94.5,25.88 96,27.38 105,27.38 105,24.5 103.62,23.12 103.62,22.5 EPD_RST.TP | 94.5,25.88 88.38,19.75 88.38,17.62 87,16.25 87,15.62 J1.10 | v31.88,37.88 31.88,38 17,52.88 17,58 16.75,58.25 U2.21 | 94.5,25.88 v88.88,31.5
  Bottom 0.127: v31.88,37.88 36.38,33.38 87,33.38 v88.88,31.5
FLASH_CS  (via drill 0.3)
  Top 0.127: R5.1 33.25,40.75 31.38,40.75 31.38,40.62 D9.1 31.25,40.62 30.88,40.62 v30.25,41.25 30.12,41.38 30.12,43.25 30.88,44 30.88,49.75 34.75,53.62 U1.1 | v22.12,39.62 22.12,40.5 21.88,40.75 U2.12
  Bottom 0.127: v22.12,39.62 23.75,41.25 v30.25,41.25
GDR  (via drill 0.3)
  Top 0.127: v90.25,18 90.25,17.88 90,17.62 90,16.5 90.75,16.5 91,16.25 91,15.62 J1.2 | v76.5,19 75.88,19.62 75.88,20 R4.2 75.75,20 75.75,19.88 67.62,19.88 64.5,16.75 Q3.1
  Bottom 0.127: v90.25,18 89.25,19 v76.5,19
GND  (via drill 0.35)
  Top 0.127: U2.29_5 13.5,48.12 12.38,48.12 U2.29_2
  other vias: 163.6,10.8 11.9,45.7 160.4,13.2 77.6,13.5 69,14.9 88.3,20.4 153.9,57.2 36.6,25.7 166.9,59.5 165.92,58.02 82.9,20.6 81.7,20.6 66.5,106.8 8.9,42.1 13.2,45.8 14.5,45.8 11.4,47.9 11.4,49.2 15.6,49.3 15.6,48.2 90,20.5 11.7,100.6 7.2,100.5 47.3,24 51.8,24.3 4.2,93.8 6.9,91.9 161.9,16 164.4,17.1 32.2,42.9 46.6,24.6 57,36 22,51 25,53 23,55 5,71 85,13 7.6,87.4 160.1,55.5 155.3,37.9 91.3,55.1 73.3,28.1 23.1,28.4 17.8,37.8 163,57 163.23,57.97 92.1,16.5 42.4,22.6 76.1,35.3 83.4,17.3
  pour Top: -2,113 -2,-2 174,-2 174,69 172,71 95,71 94,72 94,113
  pour Bottom: -4,113 -4,-3 174,-3 174,69 173,70 94,70 94,112 93,113
GPIO8
  Top 0.127: R1.1 18.62,36 19,36.38 19,40.62 19.12,40.75 U2.10
I2C_PW  (via drill 0.3)
  Top 0.127: C1.1 166.75,8.38 164.62,8.38 C2.1 164.5,8.38 163,9.88 162.62,9.88 162.62,9.75 R1_PINH.2 162.5,9.75 161.75,10.5 | 161.75,10.5 161.75,11.38 SENSOR2.6 | R2_PINH.2 160.25,9.75 160.12,9.88 160.12,11.38 SENSOR2.8 160.12,11.5 160.12,12.12 160.88,12.88 160.88,14.25 SENSOR2.2 | v22.12,57.12 22.12,58 21.88,58.25 U2.17 | v104.62,58.38 155.38,7.62 161.12,7.62 161.12,9 160.75,9.38 | 160.75,9.38 160.38,9.75 R2_PINH.2 | 161.75,10.5 160.75,9.5 160.75,9.38 | 160.75,9.38 R2_PINH.2
  Bottom 0.127: v22.12,57.12 23.38,58.38 v104.62,58.38
INT_RTC  (via drill 0.3)
  Top 0.127: 88.12,51.12 88.12,51.88 U3.3 | 88.12,51.12 88.12,50.5 89.5,50.5 89.88,50.88 89.88,53.12 89.12,53.88 89.12,54.5 89,54.62 R1-PINH1.1 | v17,42 17,41.12 16.75,40.88 U2.8 | 88.12,51.12 v80.25,43.25 | 88.12,51.12 U3.3 | TP15.TP 84.12,87.62 86.62,85.12 86.62,54.38 88,53 88,52 U3.3
  Bottom 0.127: v80.25,43.25 32.48,43.25 32.38,43.34 18.34,43.34 v17,42
IO/BOOT
  Top 0.127: C6.1 45.5,107.75 46,108.25 46,108.5 46.75,109.25 47.12,109.25 BOOT_BUTTON.4 47.25,109.38 50.62,109.38 BOOT_BUTTON.3 50.75,109.25 50.75,109.12 52.5,109.12 R_BOOT.2 52.62,109.12 52.88,109.12 53.88,108.12 53.88,87.88 24.38,58.38 U2.15
IO/CHANGE  (via drill 0.3)
  Top 0.127: C10.1 67.38,109.25 66,109.25 CHANGE_BUTTON.3 65.88,109.38 62.5,109.38 CHANGE_BUTTON.4 62.38,109.25 62.38,109.12 60.88,109.12 R_CHANGE.2 60.75,109.12 60.5,109.12 59.38,108 v59.38,105.75 | v14.38,60.75 14.38,58.5 14.25,58.38 U2.23
  Bottom 0.127: v59.38,105.75 v14.38,60.75
MISO  (via drill 0.3)
  Top 0.127: U2.27 9,58.38 8.75,58.62 8.75,59.25 v8.5,59.5 4.12,63.88 4.12,92.5 4.75,93.12 5.75,93.12 5.75,93.25 J4.P7 | D12.1 46.12,22.25 46.12,22.38 44.38,22.38 R8.1 44.25,22.38 43.25,23.38 39.5,23.38 39.5,24.25 38.75,25 34.75,25 34.75,24 34.25,23.5 | 29.62,48.88 32.62,51.88 32.62,54.25 35.38,54.25 35.62,54 35.62,53.25 34.88,52.5 U1.2 | 29.62,48.88 29.62,41 32.62,38 32.62,25.12 34.25,23.5 | 34.25,23.5 34.25,23 MISO.TP 34.25,23.5 | 29.62,48.88 v29.5,49
  Bottom 0.127: v8.5,59.5 10.5,57.5 10.75,57.5 19.25,49 v29.5,49
MOSI  (via drill 0.3)
  Top 0.127: J1.14 85,15.5 85,15 84,14 76.88,14 76.88,13.75 76.5,13.38 71.88,13.38 71.88,16 71.5,16.38 66.38,16.38 66.38,15.88 66.25,15.75 52.88,15.75 52.88,22.12 D11.1 52.75,22.25 51,22.25 | 51,22.25 50.25,22.25 R7.1 50.12,22.12 46.62,18.62 38.25,18.62 MOSI.TP 38.12,18.62 v37.12,19.62 | 51,22.25 51,24 43.62,31.38 43.62,48.75 42.62,49.75 U1.5 | 15.62,40.62 15.75,40.5 15.75,39.23 17.62,37.36 18.02,37.36 v18.5,36.88 | 15.62,40.62 15.5,40.75 U2.7 15.62,40.62 | v7,88.62 7,88.88 5.88,88.88 J4.P3 | v15.62,53.25 15.62,49.9 16.04,49.48 16.04,48.02 15.62,47.6 15.62,40.62
  Bottom 0.127: v18.5,36.88 35.75,19.62 v37.12,19.62 | v7,88.62 11.62,84 11.62,57 11.88,57 v15.62,53.25
N$3
  Top 0.127: 124.62,43.5 124.62,43.62 IC4.3 124.62,43.5 | 124.62,43.5 124.62,41.75 124.5,41.62 C1_BAT1.1 | 124.62,43.5 123.75,43.5 | 123.75,43.5 122.88,43.5 D2.1 | 123.75,43.5 123.75,45.5 124.62,45.5 IC4.1
N$4
  Top 0.127: 88,36.25 88,36.12 D4.1 88,36.25 | 88,36.25 88,36.75 92.12,36.75 94.12,34.75 94.12,31 93.38,31 C4.1 | 88,36.25 84.12,36.25 77.25,43.12 D3.2
N$5  (via drill 0.3)
  Top 0.127: v161.75,51.12 160.5,51.12 R2-USB1.2 | v165.12,52.88 164.88,53.12 164.25,53.12 J2.A5
  Bottom 0.127: v161.75,51.12 163.5,52.88 v165.12,52.88
N$6  (via drill 0.3)
  Top 0.127: v84.38,17.25 83.12,16 83.12,15.62 J1.18 | v86.75,17.5 87.25,18 87.25,18.25 EPD_C6.2
  Bottom 0.127: v84.38,17.25 84.62,17.5 v86.75,17.5
N$7
  Top 0.127: CHG_LED.C 127.12,55.5 126.25,54.62 123.38,54.62 123.38,55.38 R1_BAT.1
N$8  (via drill 0.3)
  Top 0.127: R2-USB.1 160.25,49 162.5,51.25 162.5,56.58 | J2.B5 164.25,56.12 165.12,56.12 165.15,56.15 | 165.15,56.15 165.84,56.84 165.84,57.48 165.28,58.04 163.67,58.04 | 162.5,57.12 162.5,56.58 | v165.16,56.13 165.15,56.15 | v162.56,56.58 162.5,56.58
  Bottom 0.127: v165.16,56.13 164.78,56.52 162.62,56.52 v162.56,56.58
N$9  (via drill 0.3)
  Top 0.127: v126.12,55.38 124.62,55.38 R1_BAT.2 | v132.25,54 133.25,54 MCP73831.1
  Bottom 0.127: v126.12,55.38 127.5,54 v132.25,54
N$10
  Top 0.127: R2_BAT.2 130.75,52.25 130.75,53.88 MCP73831.5
N$11
  Top 0.127: J1.20 82.12,15.62 82.12,17 83.25,18.12 83.25,18.5 EPD_C8.2
N$12
  Top 0.127: J1.5 89.5,15.62 89.5,18.12 89.38,18.25 EPD_C2.2
N$13
  Top 0.127: J1.4 90,15.5 90,14.62 90.38,14.25 93.25,14.25 93.25,18 93.5,18.25 EPD_C1.2
N$14
  Top 0.127: C_DELAY.1 51.12,100.25 49.75,101.62 49.75,102 IC1.5
N$15
  Top 0.127: J1.22 81,15.62 81,16.62 79.62,18 79.62,18.38 EPD_C10.2
N$16  (via drill 0.3)
  Top 0.127: v88.25,56.12 87.38,56.12 D7.1 | v94.5,53.12 94.88,52.75 95.25,52.75 R_CAPACITOR.1
  Bottom 0.127: v88.25,56.12 91.25,53.12 v94.5,53.12
N$17
  Top 0.127: J1.24 80,15.62 76,15.62 EPD_C12.2
PREVGH
  Top 0.127: 81.5,18.25 81.5,18.38 81.38,18.5 EPD_C9.2 81.5,18.25 | 81.5,18.25 81.5,15.62 J1.21 | 81.5,18.25 82.25,19 82.25,26 87.88,31.62 D5.1
PREVGL
  Top 0.127: 78.62,17.62 74,17.62 74,17.75 EPD_C11.2 | 78.62,17.62 79.12,17.62 80.5,16.25 80.5,15.62 J1.23 | 78.62,17.62 78.62,20.25 80,21.62 80,25.06 90.95,36.01 D4.2
RESE  (via drill 0.3)
  Top 0.127: v90.5,14.75 90.5,15.5 J1.3 | v72.75,15.88 71.5,17.12 71,17.12 R3.2 71,16.75 65.88,16.75 Q3.2
  Bottom 0.127: v90.5,14.75 89.38,15.88 v72.75,15.88
RESE'
  Top 0.127: R3.1 71,14.62 69.5,13.12 R2.2 69.38,13.12 69.38,14.12 66.62,14.12 65.75,13.25 SJ1.2
RESET  (via drill 0.3)
  Top 0.127: C5.1 20.5,109.25 22.12,109.25 RESET_BUTTON.4 22.25,109.38 25.62,109.38 RESET_BUTTON.3 25.75,109.25 27.12,109.25 R_RESET.2 27.25,109.12 27.25,109 39.88,109 45.88,103 | 45.88,103 46.75,102.12 IC1.1 | v12.62,57.12 10.62,55.12 10.62,41.12 10.38,40.88 U2.3 | 45.88,103 v45.88,90.38
  Bottom 0.127: v45.88,90.38 v12.62,57.12
RTC_RST
  Top 0.127: U2.16 23.12,58.25 23.38,58 23.38,57.38 25.62,55.12 85.5,55.12 85.5,54.5 86.75,53.25 86.75,52 U3.4
RX
  Top 0.127: U2.24 12.88,58.38 12.88,64.12 12.75,64.25 RX.TP
S$1  (via drill 0.35)
  other vias: 24.8,64.8 23,64.8 17.6,64.8 15.8,64.8 8.6,64.8 6.8,64.8 5,64.8 3.2,64.8 24.8,63 23,63 19.4,63 17.6,63 15.8,63 14,63 12.2,63 8.6,63 6.8,63 3.2,63 24.8,61.2 23,61.2 21.2,61.2 19.4,61.2 17.6,61.2 3.2,61.2 5,61.2 8.6,61.2 10.4,61.2 12.2,61.2 15.8,61.2
S$2  (via drill 0.35)
  other vias: 25,37.8 23.2,37.8 21.4,37.8 19.6,37.8 14.2,37.8 12.4,37.8 10.6,37.8 8.8,37.8 7,37.8 5.2,37.8 25,36 23.2,36 21.4,36 16,36 12.4,36 10.6,36 8.8,36 7,36 5.2,36 25,34.2 23.2,34.2 19.6,34.2 5.2,34.2 7,34.2 8.8,34.2 10.6,34.2 12.4,34.2 14.2,34.2 17.8,34.2
S$3  (via drill 0.35)
  other vias: 32,64.8 32,63 30.2,63 32,61.2 30.2,61.2 32,59.4 30.2,59.4 32,57.6 30.2,57.6 32,55.8 30.2,55.8 32,54 30.2,54 32,52.2 30.2,52.2 30.2,50.4 32,48.6 30.2,48.6 32,46.8 30.2,46.8 30.2,34.2 32,34.2 30.2,36 32,36 30.2,37.8 32,39.6
S$4  (via drill 0.35)
  other vias: 23,77.8 21.2,77.8 19.4,77.8 17.6,77.8 15.8,77.8 14,77.8 12.2,77.8 10.4,77.8 8.6,77.8 6.8,77.8 5,77.8 3.2,77.8 23,76 21.2,76 19.4,76 17.6,76 15.8,76 14,76 12.2,76 10.4,76 8.6,76 6.8,76 5,76 3.2,76 23,74.2 21.2,74.2 19.4,74.2 17.6,74.2 3.2,74.2 5,74.2 6.8,74.2 8.6,74.2 10.4,74.2 12.2,74.2 14,74.2 15.8,74.2
S$5  (via drill 0.35)
  other vias: 22,100.2 20.2,100.2 22,98.4 20.2,98.4 22,96.6 20.2,96.6 22,94.8 20.2,94.8 22,93 20.2,93 22,91.2 20.2,91.2 22,89.4 20.2,89.4 20.2,82.2 22,82.2 20.2,84 22,84 20.2,85.8 22,85.8 20.2,87.6 22,87.6
S$6  (via drill 0.35)
  other vias: 167.4,63.2 165.6,63.2 163.8,63.2 162,63.2 160.2,63.2
S$7  (via drill 0.35)
  other vias: 167,46.1 165.2,46.1 163.4,46.1 159.8,46.1
S$8  (via drill 0.35)
  other vias: 95,57.8 93.2,57.8 91.4,57.8 89.6,57.8 87.8,57.8 86,57.8 84.2,57.8 82.4,57.8 80.6,57.8 78.8,57.8 77,57.8 75.2,57.8 95,56 75.2,56 77,56 78.8,56 80.6,56 82.4,56 84.2,56 86,56
S$9  (via drill 0.35)
  other vias: 76.6,51.2 74.8,51.2 76.6,49.4 74.8,49.4 74.8,42.2 76.6,42.2 74.8,44 74.8,45.8 76.6,45.8 74.8,47.6 76.6,47.6
S$10  (via drill 0.35)
  other vias: 103,56.6 101.2,56.6 103,54.8 101.2,54.8 103,53 101.2,53 103,51.2 101.2,51.2 103,49.4 101.2,49.4 101.2,42.2 103,42.2 101.2,44 103,44 101.2,45.8 103,45.8 101.2,47.6 103,47.6
SCK  (via drill 0.3)
  Top 0.127: U1.6 42.5,51 41.75,50.25 41.75,30.07 47.04,24.78 47.04,24.42 46.86,24.23 46.86,23.82 46.88,23.8 46.88,21.38 40.5,21.38 40.5,22.62 R6.1 40.38,22.75 38.5,22.75 38.5,22.62 D10.1 38.38,22.5 34.12,18.25 | 34.12,18.25 34.12,18.62 SCK.TP | 34.12,18.25 34.12,17.5 39.25,12.38 39.25,11.88 82.38,11.88 85.5,15 85.5,15.5 J1.13 | SCK.TP 34,18.75 34,18.88 17.88,35 17.88,36.5 14.5,39.88 14.5,40.5 14.25,40.75 U2.6 14.12,40.88 14.12,41.5 v13.62,42 | v8,60.62 6.12,62.5 6.12,77.5 4.5,79.12 4.5,91.12 5.75,91.12 J4.P5 | 34.12,18.25 SCK.TP
  Bottom 0.127: v8,60.62 8,58.25 8.25,58.25 13.64,52.86 13.64,45.62 13.62,45.6 v13.62,42
SCL  (via drill 0.3)
  Top 0.127: 162.5,15.38 160.12,15.38 159.38,14.62 159.38,9.25 160.25,8.38 R2_PINH.1 | 162.5,15.38 162.5,14.38 SENSOR2.4 | 145.75,56.75 154.25,48.25 154.25,31.75 164.75,21.25 | 145.75,56.75 145.12,57.38 145.12,57.5 144.38,57.5 U4.7 | 164.75,21.25 165.12,20.88 J3.4 | 162.5,15.38 162.62,15.5 162.62,19.12 164.75,21.25 | v29,45.62 18.25,56.38 18.25,58 18,58.25 U2.20 | v90.25,44.12 90.5,43.88 90.5,42.75 U3.16 | v136.38,47.38 145.75,56.75
  Bottom 0.127: v29,45.62 74.12,45.62 74.62,45.12 89,45.12 90,44.12 v90.25,44.12 90.75,44.62 133.62,44.62 v136.38,47.38
SDA  (via drill 0.3)
  Top 0.127: 164.5,13.38 167.75,10.12 167.75,7.38 163.62,7.38 162.62,8.38 R1_PINH.1 | 164.5,13.38 161.75,13.38 161.75,14.25 SENSOR2.3 | 165.75,20 166.12,20.38 166.12,21.38 155.75,31.75 155.75,47.25 145,58 144.38,58 U4.8 144.25,58 v143.75,58.5 | 165.75,20 165.12,20 J3.3 165.75,20 | 164.5,13.38 166.25,15.12 166.25,19.5 165.75,20 | v19.5,57.12 19.5,58 19.25,58.25 U2.19 | v89.38,45.38 89.38,42.75 U3.15
  Bottom 0.127: v19.5,57.12 25.62,51 74.12,51 79.62,45.5 89.25,45.5 v89.38,45.38 89.62,45.12 121.62,45.12 128.25,51.75 137,51.75 v143.75,58.5
SRC  (via drill 0.3)
  Top 0.127: C4.2 93.25,32.12 91.5,32.12 91.5,31.75 D5.2 91.38,31.62 v89.75,31.62 | v65.25,25.75 65.25,18.75 Q3.3 | v72.08,31.98 72.5,32.4 72.5,35.5 L1.1
  Bottom 0.127: v65.25,25.75 65.85,25.75 v72.08,31.98 73.17,30.88 89,30.88 v89.75,31.62
SS_SD  (via drill 0.3)
  Top 0.127: D8.1 14.25,99.12 9.38,99.12 R10.1 9.25,99.12 7.77,97.64 7.77,88.64 6.75,87.62 6.75,87.5 | 6.75,87.5 6.5,87.75 6.25,87.75 J4.P2 | 6.75,87.5 v7.5,86.75 | U2.4 11.5,40.88 11.38,41 11.38,47.3 10.96,47.72 10.96,49.38 11.38,49.8 v11.38,54.5
  Bottom 0.127: v11.38,54.5 7.5,58.38 v7.5,86.75
TX
  Top 0.127: U2.25 11.5,58.38 11.25,58.62 11.25,62.12 10.25,63.12 10.25,64.25 TX.TP
USB_D+  (via drill 0.3)
  Top 0.127: v147.5,56.12 155.5,56.12 D1.1 | v25.12,40.75 24.38,40.75 U2.14
  Bottom 0.127: v147.5,56.12 132.12,40.75 v25.12,40.75
USB_D-  (via drill 0.3)
  Top 0.127: v149.38,54.25 155.5,54.25 D1.3 | v24.12,39 23.12,40 23.12,40.75 U2.13
  Bottom 0.127: v149.38,54.25 134.12,39 v24.12,39
VBAT
  Top 0.3: U4.2 142.38,57.38 142.38,57 U4.3 142.25,57.12 138,57.12 138,56.75 C2_BAT.1 137.88,56.62 137.88,55.88 | 137.88,55.88 137.88,54 136.88,53 Q1.3 | 137.88,55.88 133.38,55.88 MCP73831.3 133.38,56 133.38,61.25 129.5,65.12 TP3.TP
VBUS
  Top 0.3: 157,57.88 159.5,57.88 C4_USB.1 | 157,57.88 152.38,57.88 C5_USB.1 152.25,57.88 145.62,57.88 137,66.5 125.62,66.5 125.62,65 TP14.TP 125.38,65.12 128.62,61.88 128.62,57.75 | 157,55.25 158,55.25 D1.5 | 157,57.88 157,55.25 | 157,55.25 157,44.75 156.88,44.62 PFMF.050.1.2 | Q1.1 135.88,50.88 133.62,53.12 131.75,53.12 131.75,53.75 131.62,53.88 131.62,54.75 130.75,55.62 130.75,55.75 MCP73831.4 130.62,55.88 128.75,57.75 128.62,57.75 | R1_PWRUSB.2 120.62,45.25 122.75,45.25 122.75,45.38 D2.2 122.75,45.62 123.62,46.5 123.62,49.12 127.25,52.75 127.25,53.5 C1_BAT.1 127.38,53.62 127.38,54.25 128.62,55.5 CHG_LED.A 128.62,55.62 128.62,57.75
VRTC
  Top 0.3: C11.1 88.5,39.88 88.12,40.25 88.12,42.62 U3.14 88.12,42.75 88.12,44.88 89.25,46 96,46 | 96,46 96,47.88 96.25,48.12 96.25,53.88 95.38,53.88 R_CAPACITOR.2 | 96,46 97.25,44.75 C10_SUPERCAP.2
VUSB
  Top 0.3: J2.A4 164.12,51.88 164.12,52 J2.B9 164,52 162.88,52 | 164.12,56.75 164.12,56.88 J2.A9 | 164.12,56.75 164.12,56.62 J2.B4 | 162.88,52 162.88,56.12 163.5,56.75 164.12,56.75 | 162.88,52 162.88,47.75 161.38,46.25 161.38,44.62 PFMF.050.1.1